# Altium PCB pcb-ldc-hw.PcbDoc (part 2 of 2)
Units mm, origin at the board's own origin, x right, y up, seen from the top; angles counter-clockwise.
Board outline 120 x 80 mm, 2 copper layers (Top Layer, Bottom Layer); 78 components, 30 nets, 198 pads, 2 vias.
Unrouted connection lines stored in the file: 33.
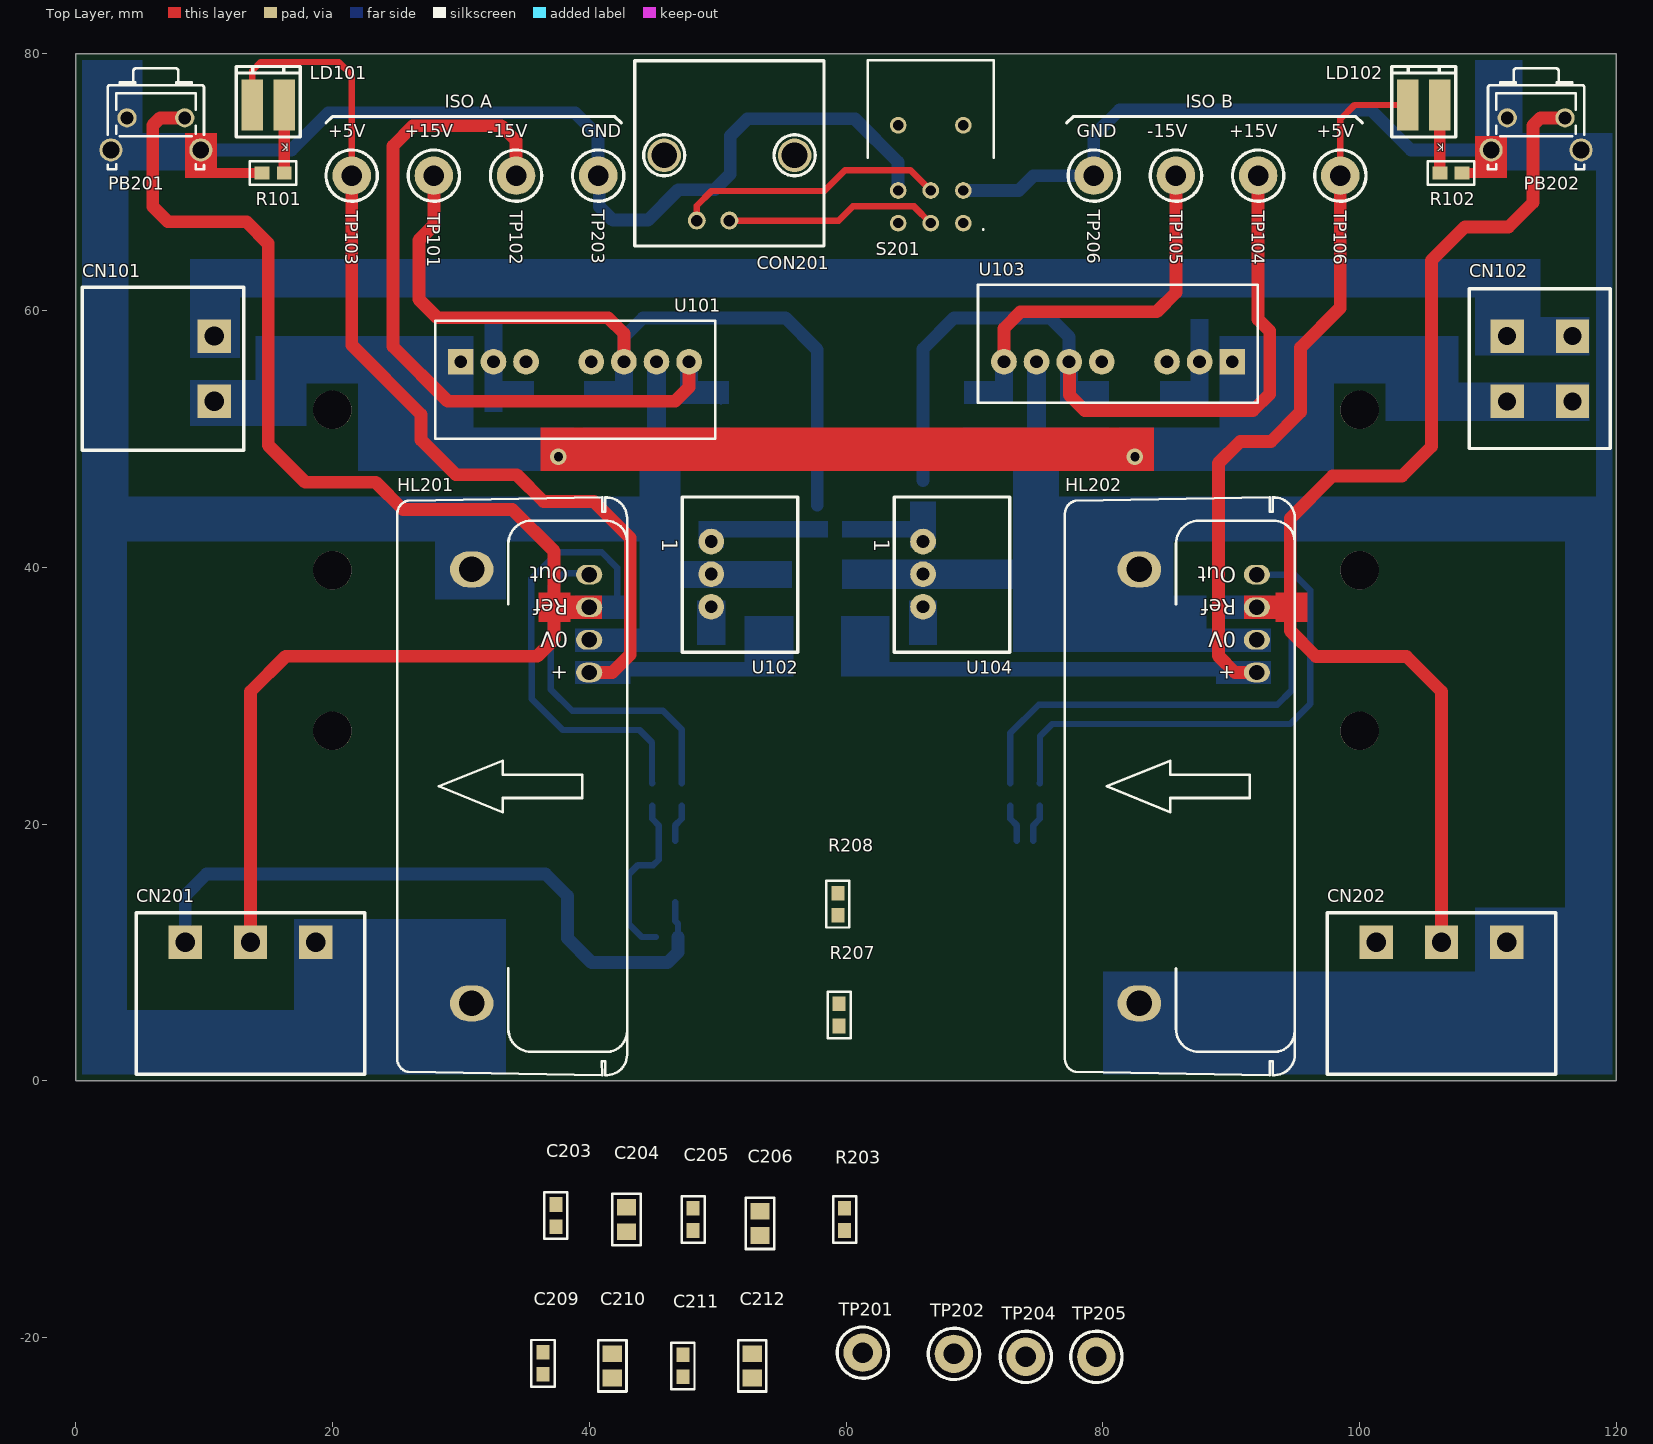
[diagram p0: Top Layer view]

## Via types
v1: diameter 1.27, hole 0.711, Top Layer to Bottom Layer, 2 vias

## Nets (pads, with @x,y where several pads share a name; then routed paths per layer and width w, separated by ;. In a path a pad name is that pad's centre, name@x,y a point inside that pad or via, vN(x,y) a via of type N, cw(c..) or ccw(c..) an arc to the next point about the centre after c; other vN are vias at no path point) (continued)
"GND ISO B": (continued)
  Bottom Layer w1: S201.4 73.46,69.34 74.61,70.49 79.29,70.49 TP206.1 79.3,73.6 81.3,75.6 100.9,75.6 104,72.5 PB202.3
"HL201 Vout": CN201.1 R204.2 S201.3 U201.6 | length 51.8
  Bottom Layer w0.5: U201.6 46.685,12.465 46.913,12.237 R204.2
  Bottom Layer w1: CN201.1 8.54,14.44 10.2,16.1 36.6,16.1 38.3,14.4 38.3,11.1 40.2,9.2 46.1,9.2 46.906,10.006 46.906,11.193 R204.2
"HL202 Vout": CN202.1 R208.2 S201.1 U202.6
NetC101_2: C101.2 C102.2 FB101.2 U101.2 | length 0.2
  Bottom Layer w0.254: U101.2 32.6,55.94 U101.2
NetC107_2: C107.2 C108.2 FB102.2 U102.1
NetC111_2: C111.2 C112.2 FB104.2 U103.2
NetC117_2: C117.2 C118.2 FB105.2 U104.1
NetC202_1: C202.1 CN201.2 HL201.3 PB201.2 R201.1 TP201.1 | length 147.7
  Top Layer w1: PB201.2 6.586,75 6,74.414 6,68.1 7.2,66.9 13.3,66.9 15,65.2 15,49.5 17.88,46.62 23.38,46.62 25.5,44.5 34.01,44.5 37.27,41.24 37.27,36.88 ; CN201.2 13.62,30.32 16.36,33.06 35.95,33.06 37.27,34.38 37.27,36.88 ; 37.25,36.9 37.27,36.88
  Bottom Layer w0.5: HL201.3@40.975,36.88 41.515,36.88 42.17,37.535 42.17,39.97 40.97,41.17 37.56,41.17 35.5,39.11 35.5,32.76 35.51,32.75 35.51,29.75 37.94,27.32 43.92,27.32 44.89,26.35 44.89,23.173 R201.1
NetC208_1: C208.1 CN202.2 HL202.3 PB202.2 R205.1 TP204.1 | length 124.5
  Top Layer w1: CN202.2 106.38,30.32 103.65,33.05 96.61,33.05 94.604,35.056 94.604,36.88 94.604,43.804 97.9,47.1 103.3,47.1 105.6,49.4 105.6,63.9 108.2,66.5 111.6,66.5 113.5,68.4 113.5,74.414 114.086,75 PB202.2
  Bottom Layer w0.5: R205.1 72.8,27.09 75.01,29.3 93.6,29.3 94.7,30.4 94.7,36.22 94.04,36.88 HL202.3 HL202.3@92.106,36.774
NetCON201_1: CON201.1 S201.2 | length 16.7
  Top Layer w0.5: CON201.1 59.43,67 60.53,68.1 65.3,68.1 S201.2
NetCON201_2: CON201.2 S201.5 | length 21.2
  Top Layer w0.5: CON201.2 48.38,68.16 49.52,69.3 58.3,69.3 59.93,70.93 65.01,70.93 S201.5
  Bottom Layer w0.254: S201.5 S201.5@66.62,69.36
NetFB103_1: FB103.1 U102.3
NetFB106_1: FB106.1 U104.3
NetHL201_4: HL201.4 R202.1 TP202.1 | length 27.2
  Bottom Layer w0.5: HL201.4 39.9,39.52 38.02,39.52 36.99,38.49 36.99,30.49 38.67,28.81 45.75,28.81 47.2,27.36 R202.1
NetHL202_4: HL202.4 R206.1 TP205.1 | length 39.3
  Bottom Layer w0.5: R206.1 75.11,23.173 75.11,26.83 76.07,27.79 94.6,27.79 96.16,29.35 96.16,38.19 94.93,39.42 HL202.4
NetLD101_1: LD101.1 R101.2
NetLD102_1: LD102.1 R102.2
NetR201_2: R201.2 R204.1 U201.2 | length 13.6
  Bottom Layer w0.5: R201.2 44.9,20.4 45.415,19.885 45.415,17.223 44.992,16.8 43.8,16.8 43.1,16.1 43.1,12.2 44.1,11.2 R204.1
NetR202_2: R202.2 R203.2 U201.3 | length 3
  Bottom Layer w0.5: U201.3@46.704,18.719 U201.3 46.685,19.885 47.2,20.4 R202.2
NetR205_2: R205.2 R208.1 U202.2 | length 3
  Bottom Layer w0.5: R205.2 72.8,20.4 73.315,19.885 U202.2
NetR206_2: R206.2 R207.2 U202.3 | length 3
  Bottom Layer w0.5: U202.3 74.585,19.885 75.1,20.4 R206.2
pads on no net: CON201.0 S201.MH1 S201.MH2 U101.3 U101.5 U103.3 U103.5 U201.1 U201.5 U201.8 U202.1 U202.5 U202.8

## Other copper
Top Layer:
  region net NetC202_1: 41,37.79 36.06,37.79 36.06,35.97 41,35.97
  region net NetC202_1: 38.53,38.03 36.06,38.03 36.06,35.72 38.53,35.72
  rectangle net NetC208_1: 93.47,35.73 95.94,38.04
  rectangle net NetC208_1: 91,35.97 95.94,37.79
  rectangle net "GND ISO A": 8.5,70.3 14.517,71.1
  rectangle net "GND ISO A": 8.5,70.3 11,73.8
  rectangle net NetLD101_1: 15.8,70.7 16.7,76
  rectangle net "GND ISO B": 107.983,70.3 111.5,71.1
  rectangle net NetLD102_1: 105.8,70.7 106.7,76
  rectangle net "GND ISO B": 109,70.3 111.5,73.6
  rectangle net GND: 36.2,47.5 84,50.9
Bottom Layer:
  rectangle net "GND ISO B": 84,33.45 88.06,37.79
  region net NetC208_1: 93.12,37.785 88.93,37.785 88.93,35.975 93.12,35.975
  rectangle net NetC202_1: 38.88,35.975 43.07,37.785
  rectangle net "GND ISO B": 118.4,0.5 119.7,73.8
  rectangle net "GND ISO B": 109,73.3 112.7,79.5
  region net "GND ISO B": 119.5,73.8 109,73.8 109,70.9 119.5,70.9
  rectangle net +15V: 109,56.5 117.9,59.5
  rectangle net "GND ISO A": 2.9,73.3 5.2,79.5
  rectangle net "GND ISO A": 0.5,70.9 11,73.8
  rectangle net "GND ISO A": 0.5,42 4.1,79.5
  region net "+5V ISO B": 93.12,32.7 88.8,32.7 88.8,30.9 93.12,30.9
  rectangle net "+5V ISO B": 59.6,31.5 93.1,32.6
  rectangle net "+5V ISO B": 59.6,31.5 63.4,36.2
  rectangle net NetFB106_1: 64.9,33.95 67.1,37.4
  rectangle net NetC117_2: 59.7,42.3 67,43.6
  rectangle net NetC117_2: 65,41.5 67,45.1
  rectangle net "GND ISO B": 116,0.5 119.5,45.5
  rectangle net "GND ISO B": 79,42 118.8,45.5
  rectangle net "GND ISO A": 0.5,0.5 33.5,5.5
  rectangle net "GND ISO A": 0.5,0.5 4,45.5
  rectangle net "+5V ISO A": 38.88,30.9 43.2,32.7
  rectangle net "+5V ISO A": 38.9,31.5 55.9,32.6
  rectangle net "+5V ISO A": 52.1,31.5 55.9,36.2
  rectangle net NetFB103_1: 48.4,33.95 50.6,37.4
  rectangle net NetC107_2: 48.5,41.5 50.5,43.1
  rectangle net NetC107_2: 48.5,42.3 58.6,43.6
  rectangle net "-15V ISO B": 71.6,53.2 73,56.5
  rectangle net "+15V ISO A": 42,53.2 43.4,56
  rectangle net "GND ISO A": 44.49,47.5 45.99,56.5
  rectangle net "GND ISO B": 73,33.4 85.5,45.5
  rectangle net "-15V ISO B": 69.2,52.7 73,54.5
  rectangle net "-15V ISO A": 47.08,52.7 50.88,54.5
  rectangle net "-15V ISO A": 47.08,53.2 48.48,56.5
  rectangle net "GND ISO B": 74.09,47.5 75.59,56.5
  rectangle net "GND ISO B": 109,2.9 119.5,13.5
  rectangle net "GND ISO B": 80,0.5 119.5,8.5
  rectangle net "GND ISO A": 17,0.5 33.5,12.6
  rectangle net "GND ISO A": 0.5,42 47.1,45.5
  rectangle net "GND ISO A": 28,37.5 33.5,44
  region net "GND ISO B": 93.12,35.21 73.08,35.21 73.08,33.4 93.12,33.4
  rectangle net "GND ISO B": 73,38.4 76.6,50.9
  rectangle net "GND ISO B": 59.7,38.3 76.6,40.6
  rectangle net "GND ISO B": 69.1,47.5 80.478,50.9
  rectangle net "+15V ISO B": 76.68,52.7 80.48,54.5
  rectangle net "+15V ISO A": 39.6,52.7 43.4,54.5
  rectangle net "+15V ISO B": 76.68,53.2 78.08,56
  rectangle net "GND ISO A": 43.92,33.4 47.1,50.9
  rectangle net "GND ISO A": 38.88,33.4 45.6,35.21
  rectangle net "GND ISO A": 44.02,38.4 55.8,40.5
  rectangle net "GND ISO A": 39.5,47.5 50.98,50.9
  rectangle net +15V: 28.3,61 111.5,64
  rectangle net NetC111_2: 84.44,52.7 88.24,54.5
  rectangle net NetC111_2: 86.84,52.1 88.24,59.35
  rectangle net GND: 81.3,47.5 91.5,50.9
  rectangle net GND: 89.08,47.5 98,54.95
  rectangle net GND: 89.08,54.3 103.3,58
  rectangle net GND: 102,51.4 107.7,58
  rectangle net GND: 102,51.4 117.9,54.4
  rectangle net +15V: 109,56.5 114.1,64
  rectangle net GND: 30,47.5 38.8,50.9
  rectangle net GND: 22,47.5 31,56.4
  rectangle net GND: 16.1,54.3 31,58
  rectangle net GND: 14,53.6 18,58
  rectangle net GND: 8.9,51 18,54.6
  rectangle net +15V: 8.9,56.3 12.8,64
  rectangle net +15V: 8.9,61 33.4,64
  rectangle net NetC101_2: 31.9,52.7 35.7,54.5
  rectangle net NetC101_2: 31.84,52.1 33.24,59.35

## Silkscreen, mask and mechanical layers (free items; w line width, h text height)
Top Overlay:
  lines w0.254: 77.2,74.6 77.7,75.1 78.2,75.1 99.7,75.1 100.2,74.6 ; 19.5,74.6 19.5,74.6 ; 19.5,74.6 19.5,74.6 ; 19.5,74.6 20,75.1 20.5,75.1 42,75.1 42.5,74.6 ; 42.5,74.6 42.5,74.6
  text "ISO A" at 28.751,75.8 h1
  text "ISO B" at 86.451,75.8 h1
  text "+5V" at 19.667,73.5 h1
  text "+15V" at 25.651,73.5 h1
  text "-15V" at 32.051,73.5 h1
  text "GND" at 39.367,73.5 h1
  text "GND" at 77.967,73.5 h1
  text "-15V" at 83.451,73.5 h1
  text "+15V" at 89.851,73.5 h1
  text "+5V" at 96.667,73.5 h1
Mechanical 1:
  lines w0.254: -0.4,0 119.6,0 ; 0,0 0,80 120,80 120,0

## Text inside footprints (layer, text, board x,y; h text height)
C101: Mechanical 29 "C?" at 33.2,49.4 h0.8 r90
C102: Mechanical 29 "C?" at 34.732,54.239 h0.8 r270
C103: Mechanical 29 "C?" at 39.652,54.239 h0.8 r270
C104: Mechanical 29 "C?" at 43.3,49.4 h0.8 r90
C105: Mechanical 29 "C?" at 49.912,54.239 h0.8 r270
C106: Mechanical 29 "C?" at 48.38,49.4 h0.8 r90
C107: Mechanical 29 "C?" at 53.3,39.6 h0.8 r90
C108: Mechanical 29 "C?" at 54.832,44.039 h0.8 r270
C109: Mechanical 29 "C?" at 53.158,34.961 h0.8 r90
C110: Mechanical 29 "C?" at 55.748,34.961 h0.8 r90
C111: Mechanical 29 "C?" at 88.14,49.4 h0.8 r90
C112: Mechanical 29 "C?" at 84.492,54.239 h0.8 r270
C113: Mechanical 29 "C?" at 79.512,54.239 h0.8 r270
C114: Mechanical 29 "C?" at 77.98,49.4 h0.8 r90
C115: Mechanical 29 "C?" at 69.252,54.239 h0.8 r270
C116: Mechanical 29 "C?" at 72.9,49.4 h0.8 r90
C117: Mechanical 29 "C?" at 63.4,39.6 h0.8 r90
C118: Mechanical 29 "C?" at 59.752,44.039 h0.8 r270
C119: Mechanical 29 "C?" at 63.258,34.961 h0.8 r90
C120: Mechanical 29 "C?" at 60.668,34.961 h0.8 r90
C201: Mechanical 29 "C?" at 42.042,35.239 h0.8 r270
C202: Mechanical 29 "C?" at 41.1,36.28 h0.8
C203: Mechanical 29 "C?" at 37.858,-8.261 h0.8 r90
C204: Mechanical 29 "C?" at 43.5,-8.4 h0.8 r90
C205: Mechanical 29 "C?" at 48.558,-8.561 h0.8 r90
C206: Mechanical 29 "C?" at 53.9,-8.7 h0.8 r90
C207: Mechanical 29 "C?" at 89.042,35.239 h0.8 r270
C208: Mechanical 29 "C?" at 90.9,37.48 h0.8 r180
C209: Mechanical 29 "C?" at 36.858,-19.761 h0.8 r90
C210: Mechanical 29 "C?" at 42.4,-19.8 h0.8 r90
C211: Mechanical 29 "C?" at 47.758,-19.961 h0.8 r90
C212: Mechanical 29 "C?" at 53.3,-19.8 h0.8 r90
CN101: Mechanical 29 "CN?" at 4.85,57.4 h1.5 r270
CN102: Mechanical 29 "CN?" at 117.45,53.52 h1.5 r90
CN201: Mechanical 29 "CN?" at 11.54,5.3 h1.5
CN202: Mechanical 29 "CN?" at 104.3,5.3 h1.5
FB101: Mechanical 29 "FB?" at 32.151,62.428 h0.8 r270
FB102: Mechanical 29 "FB?" at 57.371,46.228 h0.8 r270
FB103: Mechanical 29 "FB?" at 49.111,35.328 h0.8 r270
FB104: Mechanical 29 "FB?" at 87.151,62.428 h0.8 r270
FB105: Mechanical 29 "FB?" at 65.611,48.128 h0.8 r270
FB106: Mechanical 29 "FB?" at 65.611,35.328 h0.8 r270
HL201: Top Overlay "Out" at 38.385,40.045 h1.2 r180; Top Overlay "Ref" at 38.385,37.505 h1.2 r180; Top Overlay "0V" at 38.385,34.965 h1.2 r180; Top Overlay "+" at 38.36,32.3 h1.2 r180; Mechanical 14 "Out" at 38.385,40.045 h1.2 r180; Mechanical 14 "Ref" at 38.385,37.505 h1.2 r180; Mechanical 14 "0V" at 38.385,34.965 h1.2 r180; Mechanical 14 "+" at 38.36,32.3 h1.2 r180
HL202: Top Overlay "Out" at 90.385,40.045 h1.2 r180; Top Overlay "Ref" at 90.385,37.505 h1.2 r180; Top Overlay "0V" at 90.385,34.965 h1.2 r180; Top Overlay "+" at 90.36,32.3 h1.2 r180; Mechanical 14 "Out" at 90.385,40.045 h1.2 r180; Mechanical 14 "Ref" at 90.385,37.505 h1.2 r180; Mechanical 14 "0V" at 90.385,34.965 h1.2 r180; Mechanical 14 "+" at 90.36,32.3 h1.2 r180
LD101: Top Overlay "K" at 16.6,73 h0.6 r180
LD102: Top Overlay "K" at 106.6,73 h0.6 r180
R101: Mechanical 29 "R?" at 17.517,70.265 h0.8
R102: Mechanical 29 "R?" at 104.983,71.135 h0.8 r180
R201: Mechanical 29 "R?" at 45.335,20.163 h0.8 r90
R202: Mechanical 29 "R?" at 47.635,20.163 h0.8 r90
R203: Mechanical 29 "R?" at 60.335,-8.663 h0.8 r90
R204: Mechanical 29 "R?" at 48.187,11.635 h0.8 r180
R205: Mechanical 29 "R?" at 73.235,20.163 h0.8 r90
R206: Mechanical 29 "R?" at 75.535,20.163 h0.8 r90
R207: Mechanical 29 "R?" at 59.905,7.267 h0.8 r90
R208: Mechanical 29 "R?" at 58.925,11.613 h0.8 r270
TP101: Mechanical 29 "Tp?" at 26.325,66.5 h1.52
TP102: Mechanical 29 "Tp?" at 32.725,66.5 h1.52
TP103: Mechanical 29 "Tp?" at 23.075,74.5 h1.52 r180
TP104: Mechanical 29 "Tp?" at 90.525,66.5 h1.52
TP105: Mechanical 29 "Tp?" at 84.125,66.5 h1.52
TP106: Mechanical 29 "Tp?" at 96.925,66.5 h1.52
TP201: Mechanical 29 "Tp?" at 59.735,-25.17 h1.52
TP202: Mechanical 29 "Tp?" at 66.835,-25.27 h1.52
TP203: Mechanical 29 "Tp?" at 39.125,66.5 h1.52
TP204: Mechanical 29 "Tp?" at 72.425,-25.5 h1.52
TP205: Mechanical 29 "Tp?" at 77.925,-25.5 h1.52
TP206: Mechanical 29 "Tp?" at 77.725,66.5 h1.52
U102: Mechanical 29 "1" at 45.725,42.2 h1.2 r270; Mechanical 29 "U?" at 52.325,40.025 h0.8 r270; Top Overlay "1" at 45.7,42.2 h1.2 r270
U104: Mechanical 29 "1" at 62.225,42.2 h1.2 r270; Mechanical 29 "U?" at 68.825,40.025 h0.8 r270; Top Overlay "1" at 62.2,42.2 h1.2 r270